# EAGLE board lcpxpresso-mainboard (EAGLE 5.11)
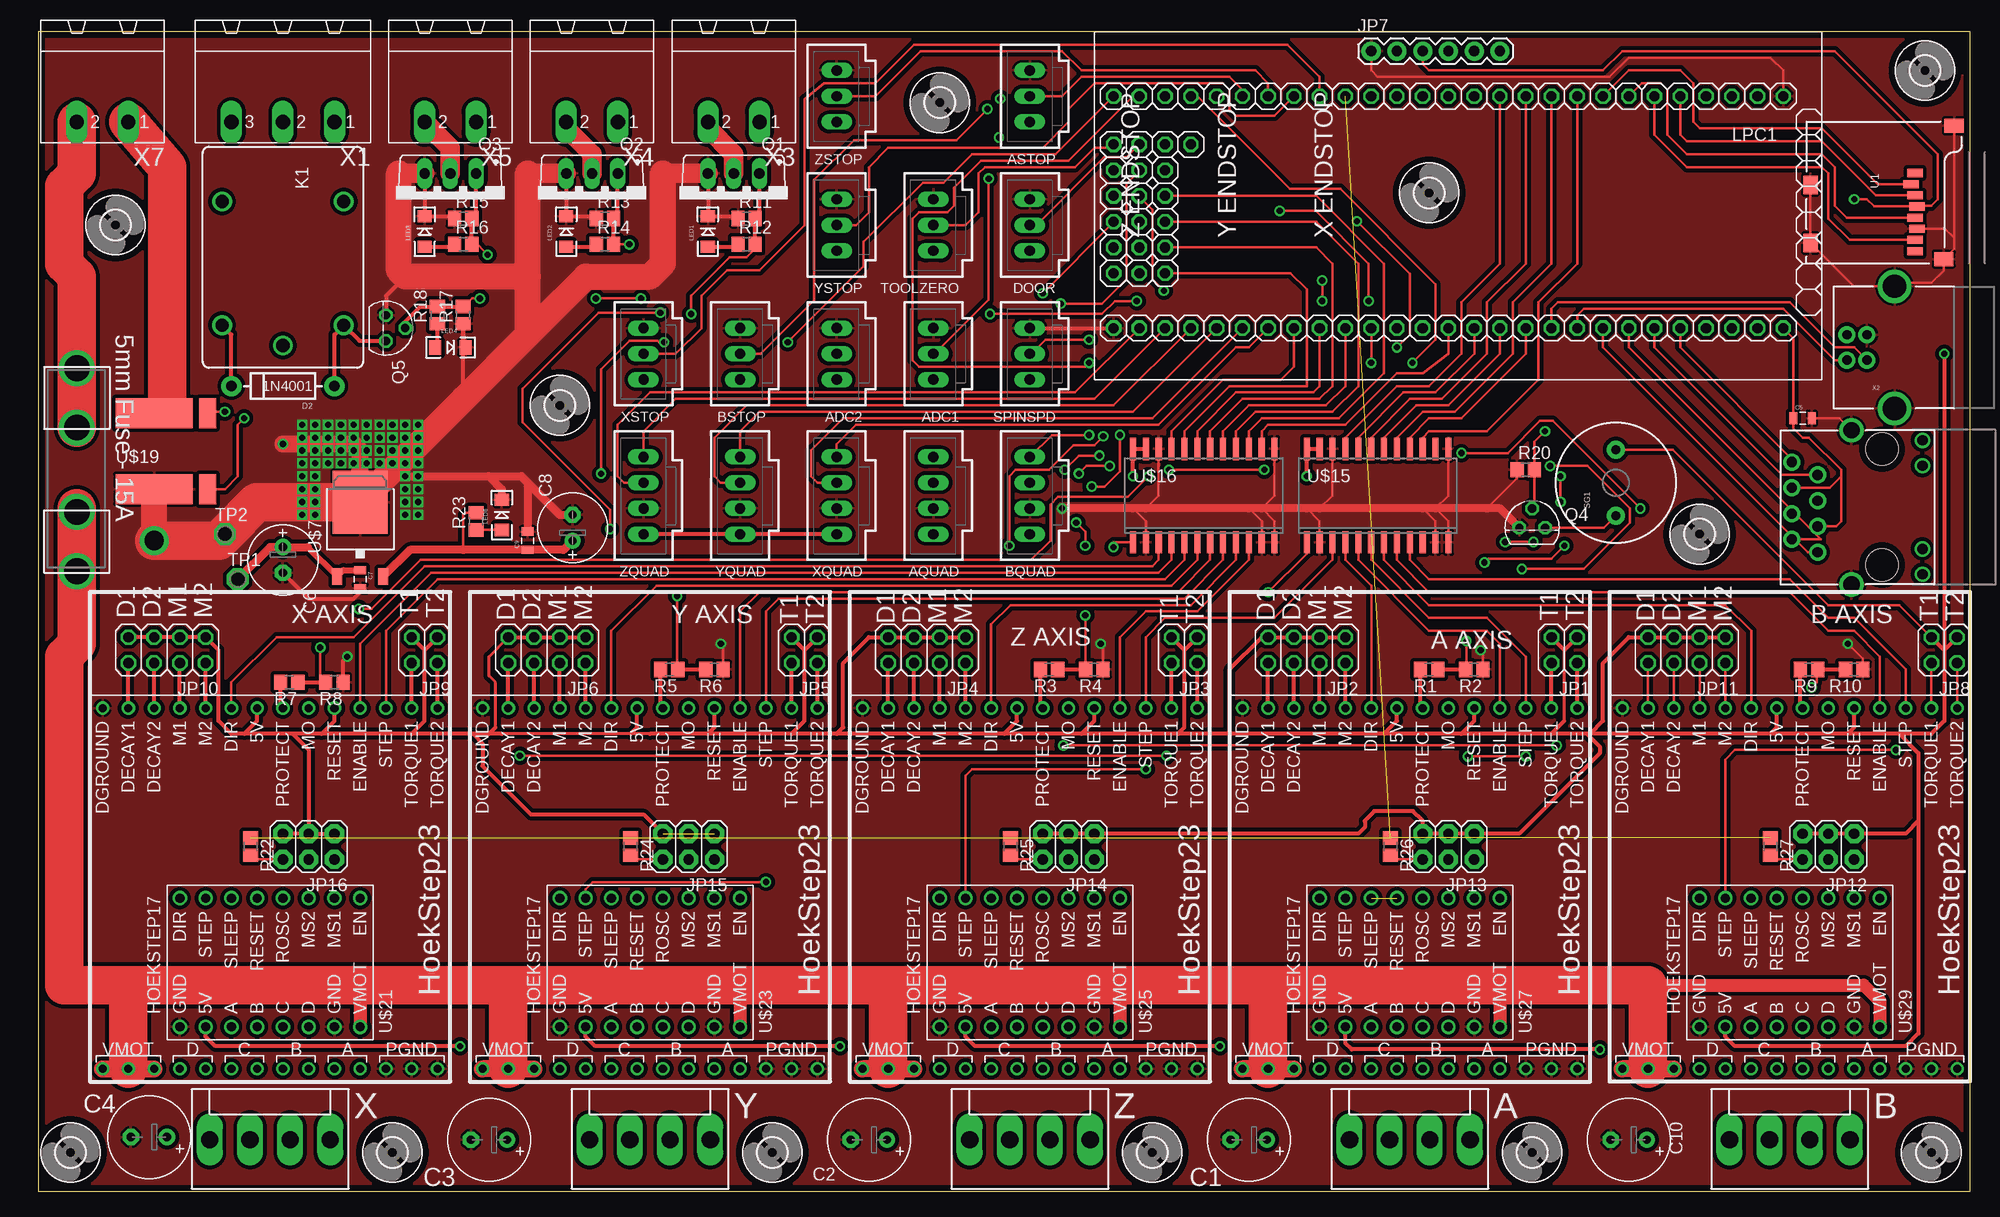
[diagram p0: board, top side]
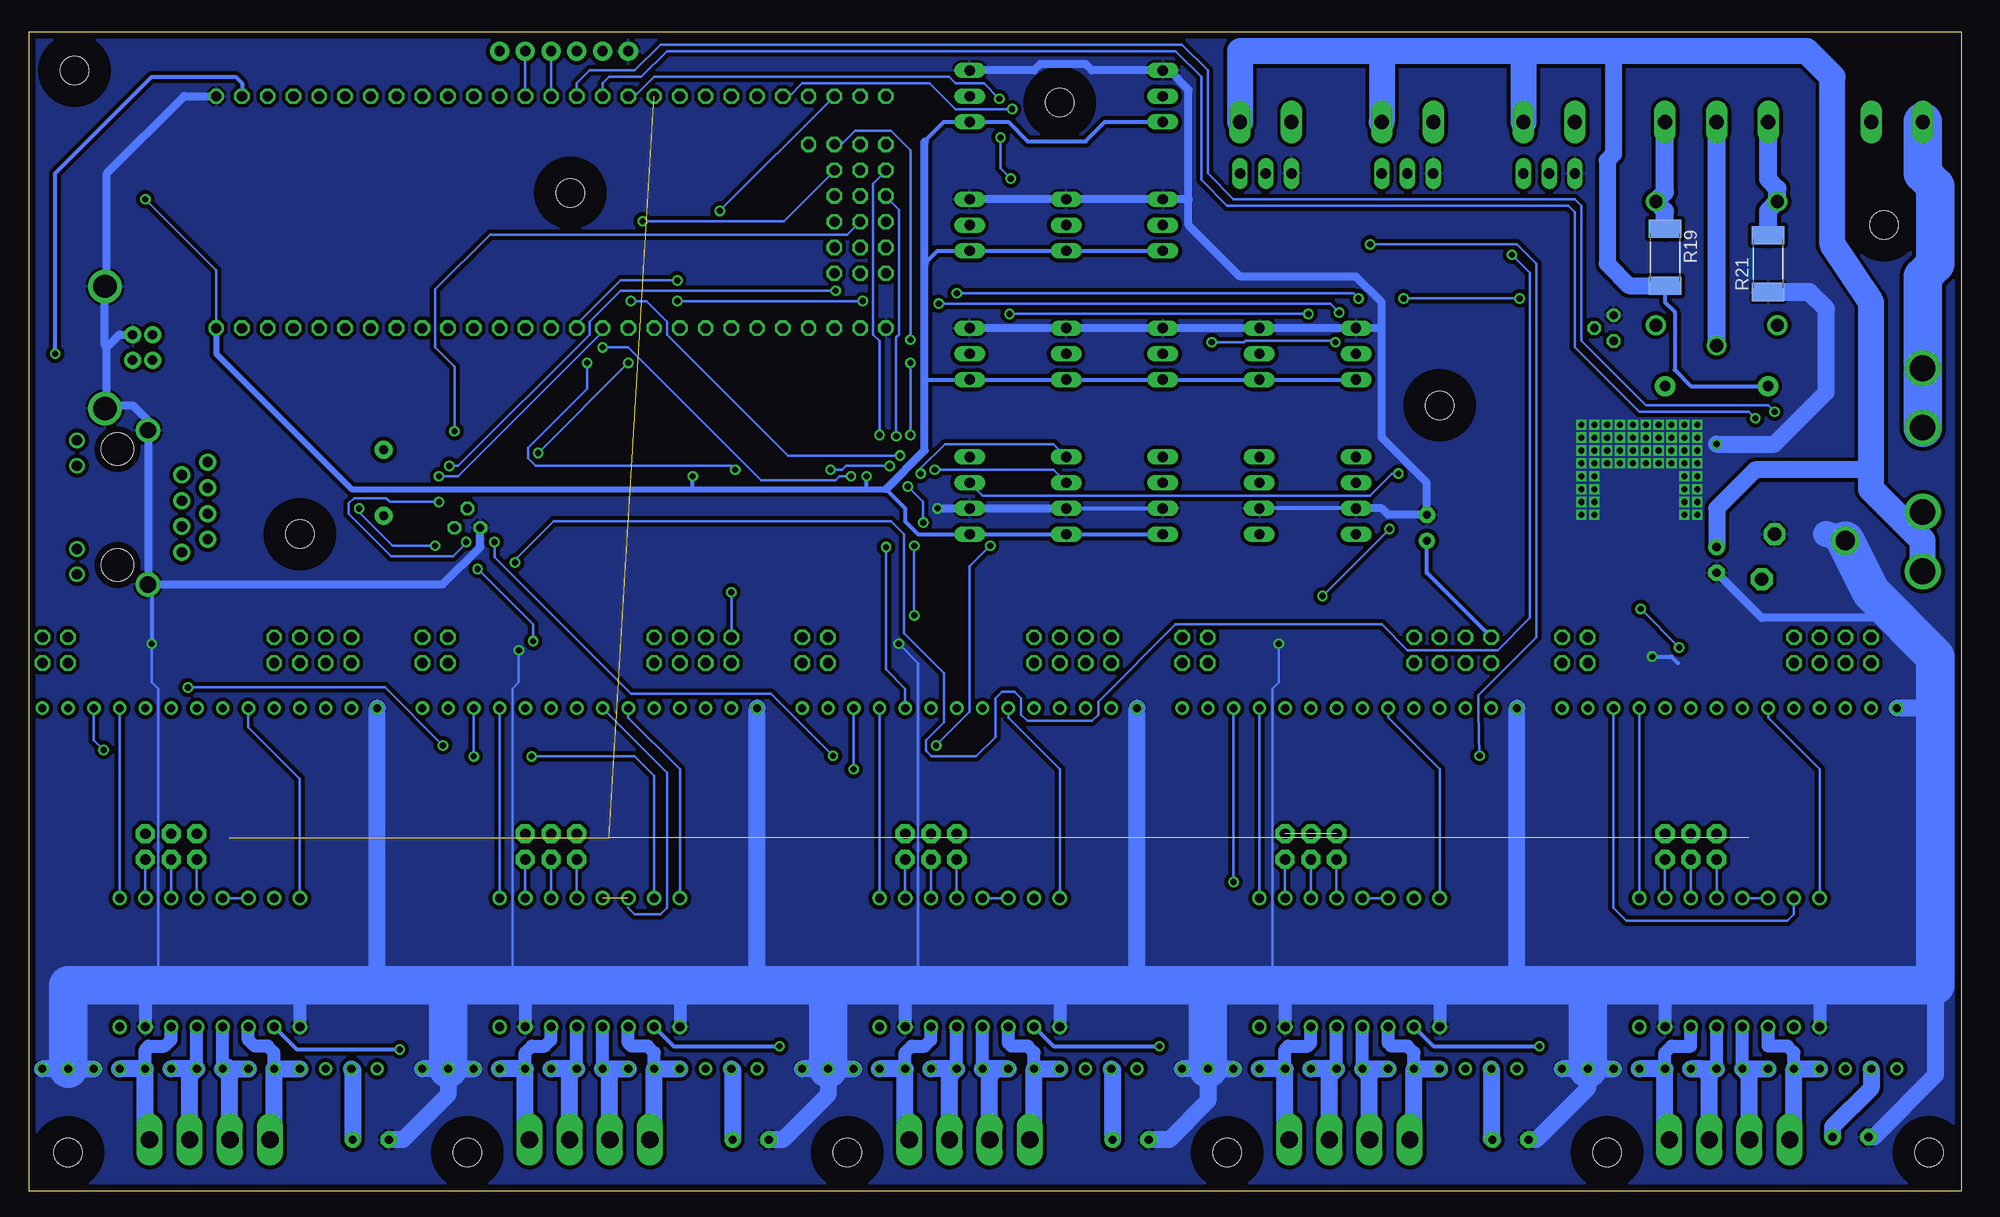
[diagram p1: board, bottom side, seen from below]

Size 190.5 x 114.3 mm. Coordinates in mm from the lower left corner, seen from the top.
Outline: 190.5,114.3 0,114.3 0,0 190.5,0 190.5,114.3
Copper layers (1*16): Top 0.035mm / dielectric 1.5mm / Bottom 0.035mm
Design rules "default *": minimum track width 10mil, minimum drill 24mil, track to track 15mil, track to pad 15mil, pad to pad 15mil, via to via 15mil, smd to smd 15mil, copper to edge 25mil, drill to drill 15mil, minimum pad ring 10mil, minimum via ring 8mil, stop-mask expansion 4mil, vias tented up to drill 0mil, thermal gap 10mil
Net classes: 0 default: width 0.406 mm, clearance 0.381 mm; 1 power: width 1.524 mm, clearance 0.635 mm; 2 highvolt: width 1.778 mm, clearance 3.175 mm; 3 signals: width 0.254 mm, clearance 0.318 mm

## Footprints (pad centres in the part's own frame; a part is rotated, then mirrored left to right if it is on the bottom)
KK-156-4 = drill 1.7 pad 2.184 long: 1 -5.94,0; 2 -1.98,0; 3 1.98,0; 4 5.94,0
70543-03 = drill 1.016 long: 1 -2.54,0; 2 0,0; 3 2.54,0
70543-04 = drill 1.016 long: 1 -3.81,0; 2 -1.27,0; 3 1.27,0; 4 3.81,0
E3,5-8 = drill 0.813 pad 1.6 round: + -1.778,0 | drill 0.813 pad 1.6 octagon: - 1.778,0
0805 = smd 0.8 x 1.2: 1 -0.9,0; 2 0.9,0
E2,5-7 = drill 0.813 pad 1.6 round: + -1.27,0 | drill 0.813 pad 1.6 octagon: - 1.27,0
DIODE-1N4001 = drill 1 pad 1.981 round: A -5.08,0; C 5.08,0
FUSE_5MM = drill 2.54 pad 3.556 round: 1 0,-10; 2 0,-4.158; 3 0,4.158; 4 0,10
2,8 = hole 2.8: 0,0
2X02 = drill 1.016 octagon: 1 -1.27,-1.27; 2 -1.27,1.27; 3 1.27,-1.27; 4 1.27,1.27
2X04 = drill 1.016 octagon: 1 -3.81,-1.27; 2 -3.81,1.27; 3 -1.27,-1.27; 4 -1.27,1.27; 5 1.27,-1.27; 6 1.27,1.27; 7 3.81,-1.27; 8 3.81,1.27
1X06 = drill 1.016 pad 1.88 round: 1 0,0; 2 2.54,0; 3 5.08,0; 4 7.62,0; 5 10.16,0; 6 12.7,0
2X03 = drill 1.016 pad 1.88 octagon: 1 -2.54,-1.27; 2 -2.54,1.27; 3 0,-1.27; 4 0,1.27; 5 2.54,-1.27; 6 2.54,1.27
JS-M = drill 1.3 round: 1 6.7,6; 2 6.7,-6; C 8.7,0; NC -5.5,-6; NO -5.5,6
LED-1206 = smd 1.2 x 1.4: A -1.5,0; C 1.5,0
LPCXPRESSO_LPC1769 = drill 1 octagon: 1 3.81,6.35; 2 6.35,6.35; 3 8.89,6.35; 4 11.43,6.35; 5 13.97,6.35; 6 16.51,6.35; 7 19.05,6.35; 8 21.59,6.35; 9 24.13,6.35; 10 26.67,6.35; 11 29.21,6.35; 12 31.75,6.35; 13 34.29,6.35; 14 36.83,6.35; 15 39.37,6.35; 16 41.91,6.35; 17 44.45,6.35; 18 46.99,6.35; 19 49.53,6.35; 20 52.07,6.35; 21 54.61,6.35; 22 57.15,6.35; 23 59.69,6.35; 24 62.23,6.35; 25 64.77,6.35; 26 67.31,6.35; 27 69.85,6.35; 28 3.81,29.21; 29 6.35,29.21; 30 8.89,29.21; 31 11.43,29.21; 32 13.97,29.21; 33 16.51,29.21; 34 19.05,29.21; 35 21.59,29.21; 36 24.13,29.21; 37 26.67,29.21; 38 29.21,29.21; 39 31.75,29.21; 40 34.29,29.21; 41 36.83,29.21; 42 39.37,29.21; 43 41.91,29.21; 44 44.45,29.21; 45 46.99,29.21; 46 49.53,29.21; 47 52.07,29.21; 48 54.61,29.21; 49 57.15,29.21; 50 59.69,29.21; 51 62.23,29.21; 52 64.77,29.21; 53 67.31,29.21; 54 69.85,29.21; 55 62.23,11.1; 56 64.77,11.1; 57 67.31,11.1; 58 69.85,11.1; 59 64.77,13.64; 60 67.31,13.64; 61 69.85,13.64; 62 64.77,16.18; 63 67.31,16.18; 64 69.85,16.18; 65 64.77,18.72; 66 67.31,18.72; 67 69.85,18.72; 68 64.77,21.26; 69 67.31,21.26; 70 69.85,21.26; 71 64.77,23.8; 72 67.31,23.8; 73 69.85,23.8
TO220BV = drill 1.016 long: D 0,-2.54; G -2.54,-2.54; S 2.54,-2.54
TO92 = drill 0.813 octagon: 1 1.27,0; 2 0,1.905; 3 -1.27,0
R0805 = smd 1.3 x 1.5: 1 -0.85,0; 2 0.85,0
R2512 = smd 1.8 x 3.2: 1 -2.8,0; 2 2.8,0
BUZZER-12MM = drill 0.9 pad 1.778 round: + 3.25,0; - -3.25,0
P1-13 = drill 1.321 pad 2.159 octagon: TP 0,0
MICRO-SD-SOCKET-PP = smd 0.8 x 1.5: 1 -8.94,10.7; 2 -7.84,10.3; 3 -6.74,10.7; 4 -5.64,10.9; 5 -4.54,10.7; 6 -3.44,10.9; 7 -2.34,10.7; 8 -1.24,10.7 | smd 1.8 x 1.4: CD1 -2.05,0.4; CD2 -7.75,0.4 | smd 1.4 x 1.9: GND1 -13.6,14.55; GND3 -0.45,13.55
HOEKSTEP23 = drill 0.8 round: A1 17.78,7.62; A2 17.78,5.08; B1 17.78,2.54; B2 17.78,0; C1 17.78,-2.54; C2 17.78,-5.08; CLOCK -17.78,10.16; D1 17.78,-7.62; D2 17.78,-10.16; DCY1 -17.78,-15.24; DCY2 -17.78,-12.7; DGND -17.78,-17.78; DIR -17.78,-5.08; EN -17.78,7.62; M1 -17.78,-10.16; M2 -17.78,-7.62; MO -17.78,2.54; PGND1 17.78,15.24; PGND2 17.78,12.7; PGND3 17.78,10.16; PROTECT -17.78,0; RESET -17.78,5.08; TQ1 -17.78,12.7; TQ2 -17.78,15.24; VCC -17.78,-2.54; VMOT1 17.78,-12.7; VMOT2 17.78,-15.24; VMOT3 17.78,-17.78
MAGJACK = drill 1 pad 1.676 round: 1 3.175,17.445; 2 4.445,19.985; 3 5.715,17.445; 4 6.985,19.985; 5 8.255,17.445; 6 9.525,19.985; 7 10.795,17.445; 8 12.065,19.985 | drill 1 pad 1.27 round: 9 1,7.1; 10 3.5,7.1; 11 11.7,7.1; 12 14.2,7.1 | drill 1.6 pad 2.184 round: GNDL 0,14.1; GNDR 15.2,14.1 | hole 3.2: 1.905,11.095; 13.335,11.095
TO252 = smd 1 x 1.6: 1 -2.28,-4.8; 2 2.28,-4.8 | smd 5.4 x 6.2: 3 0,2.5
SO24W = smd 0.6 x 2.2: 1 -6.985,-4.6; 2 -5.715,-4.6; 3 -4.445,-4.6; 4 -3.175,-4.6; 5 -1.905,-4.6; 6 -0.635,-4.6; 7 0.635,-4.6; 8 1.905,-4.6; 9 3.175,-4.6; 10 4.445,-4.6; 11 5.715,-4.6; 12 6.985,-4.6; 13 6.985,4.6; 14 5.715,4.6; 15 4.445,4.6; 16 3.175,4.6; 17 1.905,4.6; 18 0.635,4.6; 19 -0.635,4.6; 20 -1.905,4.6; 21 -3.175,4.6; 22 -4.445,4.6; 23 -5.715,4.6; 24 -6.985,4.6
WSL3637 = smd 7.62 x 2.946: 1 3.81,8.738; 4 3.81,1.27 | smd 1.676 x 2.946: 2 9.068,8.738; 3 9.068,1.27
HOEKSTEP17 = drill 0.9 round: A -6.35,-5.08; B -6.35,-7.62; C -6.35,-10.16; D -6.35,-12.7; DIR 6.35,0; ENABLE 6.35,-17.78; GND1 -6.35,0; GND2 -6.35,-15.24; MS1 6.35,-15.24; MS2 6.35,-12.7; RESET 6.35,-7.62; ROSC 6.35,-10.16; SLEEP 6.35,-5.08; STEP 6.35,-2.54; VCC -6.35,-2.54; VMOT -6.35,-17.78
MSTBA3 = drill 1.397 long: 1 -5.08,5.08; 2 0,5.08; 3 5.08,5.08
USB-B-PTH = drill 0.914 pad 1.676 round: D+ 0,1.25; D- 1.981,1.25; GND 0,-1.25; VBUS 1.981,-1.25 | drill 2.286 round: P$1 -2.718,-6.02; P$2 -2.718,6.02
MSTBA2 = drill 1.397 long: 1 -2.54,5.08; 2 2.54,5.08

## Placement (x,y rotation side)
A  [KK-156-4]  135.25,5.08 0 top
ADC1  C-GRID-03-70543  [70543-03]  88.27,82.55 90 top
ADC2  C-GRID-03-70543  [70543-03]  78.74,82.55 90 top
AQUAD  C-GRID-04-70543  [70543-04]  88.27,68.58 90 top
ASTOP  C-GRID-03-70543  [70543-03]  97.79,107.95 90 top
B  [KK-156-4]  172.72,5.08 0 top
BQUAD  C-GRID-04-70543  [70543-04]  97.79,68.58 90 top
BSTOP  C-GRID-03-70543  [70543-03]  69.22,82.55 90 top
C1  470uF  [E3,5-8]  119.38,5.08 180 top
C2  470uF  [E3,5-8]  81.92,5.08 180 top
C3  470uF  [E3,5-8]  44.45,5.08 180 top
C4  470uF  [E3,5-8]  10.92,5.33 180 top
C5  100nF  [0805]  173.99,76.2 0 top
C6  100uF  [E2,5-7]  24.13,62.23 270 top
C7  100nF  [0805]  31.75,60.33 270 top
C8  100uF  [E2,5-7]  52.7,65.41 90 top
C9  100nF  [0805]  48.26,64.14 90 top
C10  470uF  [E3,5-8]  156.84,5.08 180 top
D2  1N4001  [DIODE-1N4001]  24.13,79.38 180 top
DOOR  C-GRID-03-70543  [70543-03]  97.79,95.25 90 top
F1  FUSEX20MM  [FUSE_5MM]  3.81,71.12 0 top
H1  MOUNT-HOLE2.8  [2,8]  3.17,3.81 0 top
H2  MOUNT-HOLE2.8  [2,8]  34.92,3.81 0 top
H3  MOUNT-HOLE2.8  [2,8]  72.39,3.81 0 top
H4  MOUNT-HOLE2.8  [2,8]  109.86,3.81 0 top
H5  MOUNT-HOLE2.8  [2,8]  147.32,3.81 0 top
H6  MOUNT-HOLE2.8  [2,8]  186.69,3.81 0 top
H7  MOUNT-HOLE2.8  [2,8]  186.06,110.49 0 top
H8  MOUNT-HOLE2.8  [2,8]  163.83,64.77 0 top
H9  MOUNT-HOLE2.8  [2,8]  88.9,107.31 0 top
H10  MOUNT-HOLE2.8  [2,8]  7.62,95.25 0 top
H11  MOUNT-HOLE2.8  [2,8]  51.44,77.47 0 top
H12  MOUNT-HOLE2.8  [2,8]  137.16,98.42 0 top
JP1  [2X02]  150.5,53.34 180 top
JP2  [2X04]  125.09,53.34 180 top
JP3  [2X02]  113.03,53.34 180 top
JP4  [2X04]  87.63,53.34 180 top
JP5  [2X02]  75.56,53.34 180 top
JP6  [2X04]  50.16,53.34 180 top
JP7  [1X06]  131.44,112.39 0 top
JP8  [2X02]  187.96,53.34 180 top
JP9  [2X02]  38.1,53.34 180 top
JP10  [2X04]  12.7,53.34 180 top
JP11  [2X04]  162.56,53.34 180 top
JP12  [2X03]  176.53,33.97 180 top
JP13  [2X03]  139.06,33.97 180 top
JP14  [2X03]  101.6,33.97 180 top
JP15  [2X03]  64.14,33.97 180 top
JP16  [2X03]  26.67,33.97 180 top
K1  JS-M1-12V-5  [JS-M]  24.13,92.08 270 top
LED1  [LED-1206]  66.04,94.61 90 top
LED2  [LED-1206]  52.07,94.61 90 top
LED3  [LED-1206]  38.1,94.61 90 top
LED4  [LED-1206]  40.64,83.19 0 top
LED6  [LED-1206]  45.72,66.67 90 top
LPC1  [LPCXPRESSO_LPC1769]  175.9,114.3 180 top
Q1  IRF512  [TO220BV]  68.58,97.79 180 top
Q2  IRF512  [TO220BV]  54.61,97.79 180 top
Q3  IRF512  [TO220BV]  40.64,97.79 180 top
Q4  2N3819  [TO92]  147.32,65.41 0 top
Q5  2N3819  [TO92]  34.29,85.09 270 top
R1  22K  [R0805]  137.16,51.44 180 top
R2  39K  [R0805]  141.6,51.44 180 top
R3  22K  [R0805]  99.69,51.44 180 top
R4  39K  [R0805]  104.14,51.44 180 top
R5  22K  [R0805]  62.23,51.44 180 top
R6  39K  [R0805]  66.67,51.44 180 top
R7  22K  [R0805]  24.77,50.16 180 top
R8  39K  [R0805]  29.21,50.16 180 top
R9  22K  [R0805]  174.62,51.44 180 top
R10  39K  [R0805]  179.07,51.44 180 top
R11  10k  [R0805]  69.85,95.89 0 top
R12  100  [R0805]  69.85,93.34 0 top
R13  10k  [R0805]  55.88,95.89 0 top
R14  100  [R0805]  55.88,93.34 0 top
R15  10k  [R0805]  41.91,95.89 0 top
R16  100  [R0805]  41.91,93.34 0 top
R17  10k  [R0805]  41.91,86.36 90 top
R18  100  [R0805]  39.37,86.36 90 top
R19  DNP  [R2512]  29.21,92.08 270 bottom
R20  10k  [R0805]  146.69,71.12 0 top
R21  DNP  [R2512]  19.05,91.44 90 bottom
R22  0  [R0805]  20.95,33.97 270 top
R23  560  [R0805]  43.18,66.04 90 top
R24  0  [R0805]  58.42,33.97 270 top
R25  0  [R0805]  95.89,33.97 270 top
R26  0  [R0805]  133.35,33.97 270 top
R27  0  [R0805]  170.81,33.97 270 top
SG1  BUZZERPTH  [BUZZER-12MM]  155.57,69.85 90 top
SPINSPD  C-GRID-03-70543  [70543-03]  97.79,82.55 90 top
TOOLZERO  C-GRID-03-70543  [70543-03]  88.27,95.25 90 top
TP1  PTR1PAD1-13  [P1-13]  19.68,60.33 0 top
TP2  PTR1PAD1-13  [P1-13]  18.41,64.77 0 top
U1  USD-SOCKETNEW  [MICRO-SD-SOCKET-PP]  174.37,91.44 270 top
U$1  HOEKSTEP23  [HOEKSTEP23]  24.13,29.84 270 top
U$2  HOEKSTEP23  [HOEKSTEP23]  61.59,29.84 270 top
U$3  HOEKSTEP23  [HOEKSTEP23]  99.06,29.84 270 top
U$4  HOEKSTEP23  [HOEKSTEP23]  136.53,29.84 270 top
U$6  MAGJACK  [MAGJACK]  192.91,59.82 90 top
U$7  IXF25001  [TO252]  31.75,65.41 0 top
U$9  HOEKSTEP23  [HOEKSTEP23]  173.99,29.84 270 top
U$15  SN74LVC4245ADW  [SO24W]  132.08,68.58 0 top
U$16  SN74LVC4245ADW  [SO24W]  114.94,68.58 0 top
U$19  WSL3637  [WSL3637]  7.62,67.94 0 top
U$21  HOEKSTEP17  [HOEKSTEP17]  13.97,22.54 90 top
U$23  HOEKSTEP17  [HOEKSTEP17]  51.44,22.54 90 top
U$25  HOEKSTEP17  [HOEKSTEP17]  88.9,22.54 90 top
U$27  HOEKSTEP17  [HOEKSTEP17]  126.36,22.54 90 top
U$29  HOEKSTEP17  [HOEKSTEP17]  163.83,22.54 90 top
X  [KK-156-4]  22.86,5.08 0 top
X1  MSTBA3  [MSTBA3]  24.13,110.49 180 top
X2  USBPTH  [USB-B-PTH]  180.34,83.19 180 top
X3  MSTBA2  [MSTBA2]  68.58,110.49 180 top
X4  MSTBA2  [MSTBA2]  54.61,110.49 180 top
X5  MSTBA2  [MSTBA2]  40.64,110.49 180 top
X7  MSTBA2  [MSTBA2]  6.35,110.49 180 top
XQUAD  C-GRID-04-70543  [70543-04]  78.74,68.58 90 top
XSTOP  C-GRID-03-70543  [70543-03]  59.69,82.55 90 top
Y  [KK-156-4]  60.33,5.08 0 top
YQUAD  C-GRID-04-70543  [70543-04]  69.22,68.58 90 top
YSTOP  C-GRID-03-70543  [70543-03]  78.74,95.25 90 top
Z  [KK-156-4]  97.79,5.08 0 top
ZQUAD  C-GRID-04-70543  [70543-04]  59.69,68.58 90 top
ZSTOP  C-GRID-03-70543  [70543-03]  78.74,107.95 90 top

## Library data of the parts
A ADC1 ADC2 AQUAD ASTOP B BQUAD BSTOP DOOR SPINSPD TOOLZERO X XQUAD XSTOP Y YQUAD YSTOP Z ZQUAD ZSTOP = con-molex; OC_FARNELL: unknown; OC_NEWARK: unknown
C1-C4 C6 C8 C10 = rcl
C5 C7 C9 D2 F1 JP7 JP12-JP16 LED1-LED4 LED6 SG1 U1 = SparkFun
H1-H12 = holes
JP1-JP6 JP8-JP11 = pinhead
K1 = relay
LPC1 = LPCXpresso_boards
Q1-Q3 = transistor-power
Q4 Q5 = transistor-fet
R1-R27 = resistor
TP1 TP2 = testpad
U$1-U$4 U$6 U$7 U$9 U$19 U$21 U$23 U$25 U$27 U$29 X2 = Hoektronics
U$15 U$16 = MakerBot
X1 = con-phoenix-508; MF: FARNELL; MPN: 1757255; OC_FARNELL: 3705183; OC_NEWARK: 71C4162
X3-X5 X7 = con-phoenix-508; MF: FARNELL; MPN: 1757242; OC_FARNELL: 3705171; OC_NEWARK: 71C4161

## Nets
3.3V: ADC1.1 ADC2.1 AQUAD.1 ASTOP.1 BQUAD.1 BSTOP.1 C5.1 DOOR.1 JP7.3 LPC1.28 SPINSPD.1 TOOLZERO.1 U1.4 U$6.3 U$6.6 U$15.23 U$15.24 U$16.23 U$16.24 XQUAD.1 XSTOP.1 YQUAD.1 YSTOP.1 ZQUAD.1 ZSTOP.1
5V: C8.+ C9.1 JP1.1 JP1.3 JP2.1 JP2.3 JP2.5 JP2.7 JP3.1 JP3.3 JP4.1 JP4.3 JP4.5 JP4.7 JP5.1 JP5.3 JP6.1 JP6.3 JP6.5 JP6.7 JP8.1 JP8.3 JP9.1 JP9.3 JP10.1 JP10.3 JP10.5 JP10.7 JP11.1 JP11.3 JP11.5 JP11.7 JP12.1 JP12.3 JP12.5 JP13.1 JP13.3 JP13.5 JP14.1 JP14.3 JP14.5 JP15.1 JP15.3 JP15.5 JP16.1 JP16.3 JP16.5 LPC1.2 R23.2 SG1.+ U$1.RESET U$1.VCC U$2.RESET U$2.VCC U$3.RESET U$3.VCC U$4.RESET U$4.VCC U$7.2 U$9.RESET U$9.VCC U$15.1 U$16.1 U$21.VCC U$23.VCC U$25.VCC U$27.VCC U$29.VCC
+24V [power]: C1.+ C2.+ C3.+ C4.+ C6.+ C7.1 C10.+ D2.C F1.1 K1.2 R19.2 TP1.TP U$1.VMOT1 U$1.VMOT2 U$1.VMOT3 U$2.VMOT1 U$2.VMOT2 U$2.VMOT3 U$3.VMOT1 U$3.VMOT2 U$3.VMOT3 U$4.VMOT1 U$4.VMOT2 U$4.VMOT3 U$7.1 U$9.VMOT1 U$9.VMOT2 U$9.VMOT3 U$21.VMOT U$23.VMOT U$25.VMOT U$27.VMOT U$29.VMOT X3.1 X4.1 X5.1
AA [power]: A.4 U$4.A1 U$4.A2 U$27.D
AB [power]: A.3 U$4.B1 U$4.B2 U$27.C
AC [power]: A.2 U$4.C1 U$4.C2 U$27.B
AD [power]: A.1 U$4.D1 U$4.D2 U$27.A
ADC1 [signals]: JP2.8 U$4.DCY1
ADC2 [signals]: JP2.6 U$4.DCY2
ADIR [signals]: U$4.DIR U$15.4 U$27.DIR
AENABLE [signals]: U$4.EN U$15.5 U$27.ENABLE
AM1 [signals]: JP2.4 U$4.M1
AM2 [signals]: JP2.2 U$4.M2
ASTEP [signals]: U$4.CLOCK U$15.6 U$27.STEP
ATQ1 [signals]: JP1.4 U$4.TQ1
ATQ2 [signals]: JP1.2 U$4.TQ2
BA [power]: B.4 U$9.A1 U$9.A2 U$29.D
BB [power]: B.3 U$9.B1 U$9.B2 U$29.C
BC [power]: B.2 U$9.C1 U$9.C2 U$29.B
BD [power]: B.1 U$9.D1 U$9.D2 U$29.A
BDC1 [signals]: JP11.8 U$9.DCY1
BDC2 [signals]: JP11.6 U$9.DCY2
BDIR [signals]: U$9.DIR U$15.7 U$29.DIR
BENABLE [signals]: U$9.EN U$15.8 U$29.ENABLE
BM1 [signals]: JP11.4 U$9.M1
BM2 [signals]: JP11.2 U$9.M2
BSTEP [signals]: U$9.CLOCK U$15.9 U$29.STEP
BTQ1 [signals]: JP8.4 U$9.TQ1
BTQ2 [signals]: JP8.2 U$9.TQ2
D+ [signals]: LPC1.37 X2.D+
D- [signals]: LPC1.36 X2.D-
ETHRD+ [signals]: LPC1.33 U$6.7
ETHRD- [signals]: LPC1.32 U$6.8
ETHTD+ [signals]: LPC1.35 U$6.1
ETHTD- [signals]: LPC1.34 U$6.2
GND: ADC1.3 ADC2.3 AQUAD.2 ASTOP.3 BQUAD.2 BSTOP.3 C1.- C2.- C3.- C4.- C5.2 C6.- C7.2 C8.- C9.2 C10.- DOOR.3 JP7.1 LED1.C LED2.C LED3.C LED4.C LED6.C LPC1.1 LPC1.54 Q1.S Q2.S Q3.S Q4.3 Q5.3 R2.1 R4.1 R6.1 R8.1 R10.1 R11.1 R13.1 R15.1 R17.1 R20.1 R21.1 SPINSPD.3 TOOLZERO.3 TP2.TP U1.6 U1.CD1 U1.CD2 U1.GND1 U1.GND3 U$1.DGND U$1.PGND1 U$1.PGND2 U$1.PGND3 U$2.DGND U$2.PGND1 U$2.PGND2 U$2.PGND3 U$3.DGND U$3.PGND1 U$3.PGND2 U$3.PGND3 U$4.DGND U$4.PGND1 U$4.PGND2 U$4.PGND3 U$6.GNDL U$6.GNDR U$7.3 U$9.DGND U$9.PGND1 U$9.PGND2 U$9.PGND3 U$15.2 U$15.11 U$15.12 U$15.13 U$15.22 U$16.2 U$16.11 U$16.12 U$16.13 U$16.22 U$19.4 U$21.GND1 U$21.GND2 U$23.GND1 U$23.GND2 U$25.GND1 U$25.GND2 U$27.GND1 U$27.GND2 U$29.GND1 U$29.GND2 X2.GND X2.P$1 X2.P$2 XQUAD.2 XSTOP.3 YQUAD.2 YSTOP.3 ZQUAD.2 ZSTOP.3
N$1: U$21.RESET U$21.SLEEP
N$2: U$23.RESET U$23.SLEEP
N$3: U$25.RESET U$25.SLEEP
N$4: U$27.RESET U$27.SLEEP
N$5: U$29.RESET U$29.SLEEP
N$6: F1.3 X7.2
N$7: JP16.2 U$21.MS1
N$8: R3.2 U$3.PROTECT
N$9: JP16.4 U$21.MS2
N$10: JP16.6 R22.2 U$21.ROSC
N$11: JP15.2 U$23.MS1
N$12: JP15.4 U$23.MS2
N$13: JP15.6 R24.2 U$23.ROSC
N$14: JP14.2 U$25.MS1
N$15 [highvolt]: K1.NO R19.1 X1.1
N$16: R1.2 U$4.PROTECT
N$17 [power]: Q1.D X3.2
N$18 [signals]: LED1.A R12.1
N$19 [power]: Q2.D X4.2
N$20 [signals]: LED2.A R14.1
N$21: JP14.4 U$25.MS2
N$22: JP14.6 R25.2 U$25.ROSC
N$23: JP13.2 U$27.MS1
N$24: JP13.4 U$27.MS2
N$25 [power]: Q3.D X5.2
N$26 [signals]: LED3.A R16.1
N$27: U$19.1 X7.1
N$28 [signals]: U$15.10
N$29 [highvolt]: K1.C X1.2
N$30: D2.A K1.1 Q5.1
N$31: JP13.6 R26.2 U$27.ROSC
N$32: JP12.2 U$29.MS1
N$33: JP12.4 U$29.MS2
N$34: JP12.6 R27.2 U$29.ROSC
N$35 [signals]: LED4.A R18.1
N$37 [highvolt]: K1.NC R21.2 X1.3
N$38 [signals]: Q4.1 SG1.-
N$39: LED6.A R23.1
N$40 [signals]: U$15.14
N$42: R9.2 U$9.PROTECT
N$43: R7.2 U$1.PROTECT
N$44: R5.2 U$2.PROTECT
P0.0 [signals]: LPC1.9 U$15.15
P0.1 [signals]: LPC1.10 U$15.17
P0.2 [signals]: LPC1.21 ZSTOP.2
P0.3 [signals]: ASTOP.2 LPC1.22
P0.4 [signals]: LPC1.38 U$15.16
P0.5 [signals]: LPC1.39 U$15.18
P0.6 [signals]: LPC1.8 U1.2
P0.7 [signals]: LPC1.7 U1.5
P0.8 [signals]: LPC1.6 U1.7
P0.9 [signals]: LPC1.5 U1.3
P0.10 [signals]: LPC1.40 U$15.20
P0.11 [signals]: LPC1.41 U$16.14
P0.15: JP7.5 LPC1.13
P0.16: JP7.4 LPC1.14
P0.17 [signals]: LPC1.12 U$15.21
P0.18 [signals]: LPC1.11 U$15.19
P0.19 [signals]: DOOR.2 LPC1.57
P0.20 [signals]: LPC1.56 SPINSPD.2
P0.21 [signals]: BSTOP.2 LPC1.23
P0.22 [signals]: AQUAD.4 LPC1.24
P0.23 [signals]: LPC1.15 U$19.2
P0.24 [signals]: LPC1.16 U$19.3
P0.25 [signals]: ADC1.2 LPC1.17
P0.26 [signals]: LPC1.18 R22.1 R24.1 R25.1 R26.1 R27.1
P0.27 [signals]: AQUAD.3 LPC1.25
P0.28 [signals]: BQUAD.4 LPC1.26
P1.18: LPC1.73
P1.19: LPC1.72
P1.20 [signals]: LPC1.71 U$16.20
P1.21: LPC1.70
P1.22: LPC1.69
P1.23 [signals]: LPC1.68 U$16.18
P1.24 [signals]: LPC1.67 Q5.2 R17.2 R18.2
P1.25 [signals]: LPC1.66 Q4.2 R20.2
P1.26 [signals]: LPC1.65 U$16.16
P1.27 [signals]: LPC1.64 R9.1 R10.2
P1.28 [signals]: LPC1.63 R1.1 R2.2
P1.29 [signals]: LPC1.62 U$16.15
P1.30 [signals]: LPC1.19 XSTOP.2
P1.31 [signals]: LPC1.20 YSTOP.2
P2.0 [signals]: LPC1.42 Q1.G R11.2 R12.2
P2.1 [signals]: LPC1.43 Q2.G R13.2 R14.2
P2.2 [signals]: LPC1.44 Q3.G R15.2 R16.2
P2.3 [signals]: LPC1.45 U$16.17
P2.4 [signals]: LPC1.46 U$16.19
P2.5 [signals]: LPC1.47 U$16.21
P2.6 [signals]: LPC1.48 XQUAD.4
P2.7 [signals]: LPC1.49 XQUAD.3
P2.8 [signals]: LPC1.50 YQUAD.4
P2.9: LPC1.55
P2.10 [signals]: LPC1.51 YQUAD.3
P2.11 [signals]: LPC1.52 ZQUAD.4
P2.12 [signals]: LPC1.53 ZQUAD.3
P2.13 [signals]: BQUAD.3 LPC1.27
P3.25 [signals]: LPC1.61 R3.1 R4.2
P3.26 [signals]: LPC1.60 R5.1 R6.2
P4.28 [signals]: LPC1.59 R7.1 R8.2
P4.29 [signals]: LPC1.58 TOOLZERO.2
RESET: LPC1.4
XA [power]: U$1.A1 U$1.A2 U$21.D X.4
XB [power]: U$1.B1 U$1.B2 U$21.C X.3
XC [power]: U$1.C1 U$1.C2 U$21.B X.2
XD [power]: U$1.D1 U$1.D2 U$21.A X.1
XDC1 [signals]: JP10.8 U$1.DCY1
XDC2 [signals]: JP10.6 U$1.DCY2
XDIR [signals]: U$1.DIR U$16.3 U$21.DIR
XENABLE [signals]: U$1.EN U$16.4 U$21.ENABLE
XM1 [signals]: JP10.4 U$1.M1
XM2 [signals]: JP10.2 U$1.M2
XSTEP [signals]: U$1.CLOCK U$16.5 U$21.STEP
XTQ1 [signals]: JP9.4 U$1.TQ1
XTQ2 [signals]: JP9.2 U$1.TQ2
YA [power]: U$2.A1 U$2.A2 U$23.D Y.4
YB [power]: U$2.B1 U$2.B2 U$23.C Y.3
YC [power]: U$2.C1 U$2.C2 U$23.B Y.2
YD [power]: U$2.D1 U$2.D2 U$23.A Y.1
YDC1 [signals]: JP6.8 U$2.DCY1
YDC2 [signals]: JP6.6 U$2.DCY2
YDIR [signals]: U$2.DIR U$16.6 U$23.DIR
YENABLE [signals]: U$2.EN U$16.7 U$23.ENABLE
YM1 [signals]: JP6.4 U$2.M1
YM2 [signals]: JP6.2 U$2.M2
YSTEP [signals]: U$2.CLOCK U$16.8 U$23.STEP
YTQ1 [signals]: JP5.4 U$2.TQ1
YTQ2 [signals]: JP5.2 U$2.TQ2
ZA [power]: U$3.A1 U$3.A2 U$25.D Z.4
ZB [power]: U$3.B1 U$3.B2 U$25.C Z.3
ZC [power]: U$3.C1 U$3.C2 U$25.B Z.2
ZD [power]: U$3.D1 U$3.D2 U$25.A Z.1
ZDC1 [signals]: JP4.8 U$3.DCY1
ZDC2 [signals]: JP4.6 U$3.DCY2
ZDIR [signals]: U$3.DIR U$16.9 U$25.DIR
ZENABLE [signals]: U$3.EN U$16.10 U$25.ENABLE
ZM1 [signals]: JP4.4 U$3.M1
ZM2 [signals]: JP4.2 U$3.M2
ZSTEP [signals]: U$3.CLOCK U$15.3 U$25.STEP
ZTQ1 [signals]: JP3.4 U$3.TQ1
ZTQ2 [signals]: JP3.2 U$3.TQ2

## Tracks (layer width: path | path; a pad name or v marks a point on that pad's centre or on a via)
3.3V  (via drill 0.6)
  Top 0.254: U$6.6 176.66,69.34 177.8,70.48 | U$6.3 177.29,65.53 177.8,66.04 177.8,70.48 | JP7.3 136.53,111.12 137.16,110.49 154.31,110.49 156.21,112.39 177.16,112.39 187.32,102.23 187.32,97.79 186.69,97.16 185.35,97.16 U1.4 181.05,97.08 180.34,97.79 v179.07,97.79 | 177.8,70.48 177.8,71.12 174.62,74.3 173.99,74.3 173.09,75.19 C5.1 173.09,84.08 LPC1.28
  Top 0.406: U$16.23 U$16.24 v107.95,70.48 | U$15.23 U$15.24 v125.09,70.48 | ZQUAD.1 YQUAD.1 XQUAD.1
  Bottom 0.254: LPC1.28 172.09,90.81 v179.07,97.79
  Bottom 0.406: 102.23,103.5 100.33,105.41 ASTOP.1 93.98,105.41 92.08,103.5 86.36,103.5 84.45,105.41 ZSTOP.1 | YSTOP.1 TOOLZERO.1 DOOR.1 100.97,92.71 102.23,91.44 | 102.23,80.01 SPINSPD.1 ADC1.1 ADC2.1 BSTOP.1 XSTOP.1 | 106.05,69.22 104.14,67.31 104.14,66.04 102.87,64.77 BQUAD.1 AQUAD.1 XQUAD.1 | 107.95,69.22 v107.95,70.48 | 125.09,69.22 v125.09,70.48
  Bottom 0.61: LPC1.28 172.09,82.55 158.75,69.22 125.09,69.22 107.95,69.22 106.05,69.22
  Bottom 0.813: 106.05,69.22 102.23,73.03 102.23,80.01 102.23,91.44 102.23,103.5
5V  (via drill 0.6)  (2 unrouted)
  Top 0.254: U$16.1 106.05,63.98 v106.05,63.5 | U$15.1 125.09,62.87 v121.28,59.05 | SG1.+ 161.22,73.1 176.53,57.78 183.51,57.78 JP8.3 | R23.2 42.12,66.89 41.91,66.67 41.91,63.23
  Top 0.305: 45.72,45.09 58.42,45.09 60.33,45.09 | 150.5,46.35 150.5,53.34 | JP6.7 44.45,52.7 44.45,50.8 45.09,50.16 45.09,45.72
  Top 0.406: JP2.1 JP2.3 JP2.5 JP2.7 120.65,54.61 117.47,51.44 117.47,45.09 | JP4.1 JP4.3 JP4.5 JP4.7 81.92,54.61 79.38,52.07 79.38,45.72 78.74,45.09 | JP6.1 JP6.3 JP6.5 JP6.7 | 140.34,45.09 132.72,45.09 | 149.22,45.09 140.34,45.09 | 132.72,45.09 117.47,45.09 | 112.39,45.09 102.87,45.09 | 117.47,45.09 112.39,45.09 | 102.87,45.09 95.25,45.09 | 66.04,45.09 60.33,45.09 | 74.3,45.09 66.04,45.09 | 78.74,45.09 74.3,45.09 | 95.25,45.09 78.74,45.09 | 149.22,45.09 150.5,46.35 | 132.72,45.09 133.99,46.35 U$4.VCC | JP10.7 JP10.5 JP10.3 JP10.1 17.78,53.34 17.78,46.35 19.05,45.09 20.32,45.09 | 153.03,45.09 152.72,45.09 | 152.72,45.09 149.22,45.09 | 170.81,45.09 153.03,45.09 | 178.44,45.09 170.81,45.09 | 183.51,45.09 186.69,45.09 187.96,46.35 187.96,53.34 | 183.51,45.09 178.44,45.09 | 178.44,45.09 179.07,45.72 U$9.RESET | 170.81,45.09 171.45,45.72 U$9.VCC | JP11.1 JP11.3 JP11.5 JP11.7 | JP11.7 164.47,54.61 | 153.03,45.09 154.31,46.35 154.31,52.07 156.84,54.61 JP11.7 | JP1.1 150.5,53.34 JP1.3 | 187.96,53.34 JP8.1 | 140.34,45.09 141.6,46.35 U$4.RESET | 113.03,53.34 JP3.3 | 113.03,53.34 113.03,45.72 112.39,45.09 | 113.03,53.34 JP3.1 | 102.87,45.09 104.14,46.35 U$3.RESET | 95.25,45.09 96.52,46.35 U$3.VCC | 75.56,53.34 JP5.3 | 75.56,53.34 75.56,46.35 74.3,45.09 | 75.56,53.34 JP5.1 | 66.04,45.09 66.67,45.72 U$2.RESET | 58.42,45.09 59.05,45.72 U$2.VCC | 27.94,45.09 25.08,45.09 | 25.08,45.09 20.32,45.09 | 36.83,45.09 27.94,45.09 | 44.45,45.09 42.86,45.09 | 42.86,45.09 36.83,45.09 | 45.72,45.09 44.45,45.09 | 44.45,45.09 45.09,45.72 | 38.1,53.34 JP9.3 | 38.1,53.34 38.1,46.35 36.83,45.09 | 38.1,53.34 JP9.1 | 27.94,45.09 29.21,46.35 U$1.RESET | 20.32,45.09 21.59,46.35 U$1.VCC
  Top 0.406: v187.96,82.55 187.96,53.34 | 187.96,53.34 JP8.3 | U$29.VCC 166.37,15.24 167.32,14.29 184.15,14.29 185.42,15.56 185.42,36.51 | 185.42,36.51 185.42,43.18 183.51,45.09 | U$27.VCC 128.91,14.61 129.54,13.97 v153.99,13.97 | U$25.VCC 91.44,15.24 92.39,14.29 v116.52,14.29 | U$23.VCC 53.98,15.24 54.93,14.29 v79.06,14.29 | U$21.VCC 16.51,15.24 17.46,14.29 v41.59,14.29 | 185.42,36.51 184.15,35.24 JP12.1 JP12.3 JP12.5 | 152.72,45.09 153.99,43.81 153.99,43.18 146.05,35.24 JP13.1 JP13.3 JP13.5 136.53,36.51 135.57,37.47 131.76,37.47 130.81,36.51 130.81,35.88 130.18,35.24 JP14.1 JP14.3 JP14.5 | 42.86,45.09 43.81,44.13 43.81,41.91 48.58,37.15 59.69,37.15 JP15.5 | JP16.3 26.67,43.5 25.08,45.09 | JP16.3 JP16.5 | JP16.3 JP16.1
  Top 0.813: U$7.2 36.66,63.23 41.91,63.23 C9.1 51.8,63.23 C8.+
  Bottom 0.254: v106.05,63.5 106.05,51.44 104.14,49.53 U$3.RESET | JP2.7 v121.28,59.05 | 131.44,27.94 130.81,27.3 128.27,27.3 127.64,27.94 127.64,41.27 U$4.VCC
  Bottom 0.406: v187.96,82.55 187.96,100.33 178.44,109.86 170.18,109.86 169.54,109.22 LPC1.2 | C8.+ 52.7,60.96 JP6.7 | v153.99,13.97 164.15,13.97 U$29.VCC | v116.52,14.29 127,14.29 U$27.VCC | v79.06,14.29 89.53,14.29 U$25.VCC | v41.59,14.29 52.07,14.29 U$23.VCC
+24V
  Top 0.406: K1.2 19.05,84.45 D2.C
  Top 0.61: F1.1 5.24,59.69 | 26.57,63.5 U$7.1 30.09,61.23 C7.1
  Top 0.813: TP1.TP 22.86,63.5 C6.+ 26.57,63.5
  Top 1.27: 31.75,20.32 U$21.VMOT | U$29.VMOT 181.61,18.73 180.02,20.32 158.12,20.32 | U$27.VMOT 144.15,20 144.46,20.32 | 106.68,20.32 U$25.VMOT | 69.22,20.32 U$23.VMOT
  Top 1.676: U$2.VMOT3 U$2.VMOT2 U$2.VMOT1 | U$3.VMOT3 U$3.VMOT2 U$3.VMOT1 | U$4.VMOT3 U$4.VMOT2 U$4.VMOT1 | U$9.VMOT3 U$9.VMOT2 U$9.VMOT1 | U$1.VMOT1 U$1.VMOT2 U$1.VMOT3
  Top 3.81: 3.81,67.31 F1.1 3.81,53.98 2.54,52.7 2.54,20.32 8.89,20.32 | 8.89,20.32 31.75,20.32 46.35,20.32 | 46.35,20.32 69.22,20.32 83.82,20.32 | 83.82,20.32 106.68,20.32 121.28,20.32 | 121.28,20.32 144.46,20.32 158.12,20.32 158.75,20.32 U$9.VMOT2 | U$1.VMOT2 8.89,20.32 | 46.35,20.32 U$2.VMOT2 | 83.82,20.32 U$3.VMOT2 | 121.28,20.32 U$4.VMOT2
  Bottom 0.406: D2.C 26.67,79.38 28.26,80.96 28.26,86.68 29.21,87.63 R19.2
  Bottom 1.676: R19.2 32.76,89.28 34.92,91.44 34.92,101.6 34.29,102.23 34.29,112.39 | C4.+ 12.7,6.35 8.89,10.16 U$1.VMOT2 | U$2.VMOT2 46.35,5.21 C3.+ | C2.+ 83.69,11.94 U$3.VMOT2 | C1.+ 121.16,11.94 U$4.VMOT2 | C10.+ 158.62,11.94 U$9.VMOT2 | C6.+ 24.13,67.31 20.32,71.12 8.89,71.12
  Bottom 2.54: 43.18,112.39 34.29,112.39 15.24,112.39 12.7,109.86 12.7,93.34 8.89,87.63 8.89,71.12 8.89,69.22 3.81,64.14 F1.1 | 43.18,112.39 57.15,112.39 | 57.15,112.39 71.12,112.39 X3.1 | 57.15,112.39 X4.1 | 43.18,112.39 X5.1
AA
  Bottom 1.27: U$27.D 139.06,14.92 139.7,14.29 140.97,14.29 141.6,13.65 U$4.A2
  Bottom 1.676: A.4 141.6,5.49 U$4.A2 U$4.A1
AB
  Bottom 1.27: U$4.B2 U$27.C
  Bottom 1.524: 137.24,11.99 U$4.B2
  Bottom 1.676: A.3 137.24,11.99 137.16,12.06 | U$4.B2 U$4.B1
AC
  Bottom 1.27: U$4.C1 U$27.B
  Bottom 1.524: 133.28,11.99 U$4.C1
  Bottom 1.676: A.2 133.28,11.99 133.35,12.06 | U$4.C1 U$4.C2
AD
  Bottom 1.27: U$27.A 131.44,14.61 131.13,14.29 129.54,14.29 128.91,13.65 U$4.D1
  Bottom 1.676: A.1 128.91,5.49 U$4.D1 U$4.D2
ADC1
  Top 0.406: U$4.DCY1 JP2.8
ADC2
  Top 0.406: U$4.DCY2 JP2.6
ADIR
  Top 0.254: U$15.4 128.91,62.23 131.44,59.69 U$4.DIR
  Bottom 0.254: U$27.DIR 126.36,41.59 131.44,46.67 U$4.DIR
AENABLE
  Top 0.254: U$15.5 130.18,62.23 137.16,55.24 142.88,55.24 144.15,53.98 U$4.EN
  Bottom 0.254: U$27.ENABLE U$4.EN
AM1
  Top 0.406: U$4.M1 JP2.4
AM2
  Top 0.406: U$4.M2 JP2.2
ASTEP  (via drill 0.6)
  Top 0.254: U$15.6 131.44,62.23 137.16,56.52 142.88,56.52 146.69,52.7 U$4.CLOCK | v140.97,42.86 v146.69,42.86
  Bottom 0.254: v140.97,42.86 130.81,42.86 128.91,40.96 U$27.STEP | v146.69,42.86 U$4.CLOCK
ATQ1
  Top 0.406: U$4.TQ1 JP1.4
ATQ2
  Top 0.406: U$4.TQ2 JP1.2
BA
  Bottom 1.27: U$29.D 176.53,14.92 177.16,14.29 178.75,14.29 179.07,13.97 U$9.A2
  Bottom 1.676: B.4 179.07,5.49 U$9.A2 U$9.A1
BB
  Bottom 1.27: U$9.B2 U$29.C
  Bottom 1.676: B.3 174.7,11.36 U$9.B2 U$9.B1
BC
  Bottom 1.27: 170.5,12.06 170.81,12.38 | U$9.C1 U$29.B
  Bottom 1.676: B.2 170.74,11.36 U$9.C1 170.5,12.06 U$9.C2
BD
  Bottom 1.27: U$29.A 168.91,14.92 168.28,14.29 167,14.29 166.37,13.65 U$9.D1
  Bottom 1.676: B.1 166.37,5.49 U$9.D1 U$9.D2
BDC1
  Top 0.254: U$9.DCY1 JP11.8
BDC2
  Top 0.254: U$9.DCY2 JP11.6
BDIR
  Top 0.254: U$15.7 132.72,62.23 137.16,57.78 166.37,57.78 168.91,55.24 U$9.DIR
  Bottom 0.254: U$9.DIR 168.91,45.72 163.83,40.64 U$29.DIR
BENABLE
  Top 0.254: U$15.8 133.99,62.23 137.16,59.05 172.72,59.05 176.53,55.24 179.07,55.24 181.61,52.7 U$9.EN
  Bottom 0.254: U$9.EN U$29.ENABLE
BM1
  Top 0.254: U$9.M1 JP11.4
BM2
  Top 0.254: U$9.M2 JP11.2
BSTEP  (via drill 0.6)
  Top 0.254: U$15.9 135.25,62.23 137.16,60.33 172.72,60.33 176.53,56.52 179.07,56.52 184.15,51.44 U$9.CLOCK | U$29.STEP 166.37,42.55 167.32,43.5 v183.2,43.5
  Bottom 0.254: v183.2,43.5 184.15,44.45 U$9.CLOCK
BTQ1
  Top 0.254: U$9.TQ1 JP8.4
BTQ2
  Top 0.254: U$9.TQ2 JP8.2
D+
  Top 0.254: LPC1.37 149.22,87 149.86,87.63 172.72,87.63 177.16,83.19 179.09,83.19 X2.D+
D-
  Top 0.254: LPC1.36 151.76,86.36 152.4,87 172.09,87 177.16,81.92 178.34,81.92 X2.D-
ETHRD+
  Top 0.254: U$6.7 171.96,70.61 159.38,83.19 LPC1.33
ETHRD-
  Top 0.254: U$6.8 173.23,71.88 161.93,83.19 LPC1.32
ETHTD+
  Top 0.254: U$6.1 174.5,62.99 154.31,83.19 LPC1.35
ETHTD-
  Top 0.254: U$6.2 175.77,64.26 156.84,83.19 LPC1.34
GND  (via drill 0.6, 1.91)
  Top 0.254: 188.92,93.98 188.92,92.89 U1.GND3 187.92,90.77 186.69,89.53 183.39,89.53 X2.P$1 179.06,89.2 U1.CD1 U1.CD2 | 188.92,93.98 U1.GND1 | U1.6 188.02,94.88 188.92,93.98 | U$15.2 126.36,66.04 125.09,67.31 | U$16.12 121.92,66.04 120.65,67.31 121.92,68.58 U$16.13 | U$16.11 120.65,66.04 119.38,67.31 | U$16.2 109.22,66.04 107.95,67.31 | U$16.22 110.49,68.58 109.22,67.31 | U$15.22 127.64,68.58 126.36,67.31 | U$15.12 139.06,66.04 137.79,67.31 139.06,68.58 U$15.13 | U$15.11 137.79,66.04 136.53,67.31 | R20.1 145.84,70.27 142.88,67.31 | R10.1 179.92,52.49 v178.44,53.98 | JP7.1 131.44,110.49 132.08,109.86 154.94,109.86 156.84,111.76 170.81,111.76 172.09,110.49 LPC1.1 | R6.1 67.53,53.76 v67.31,53.98 | R4.1 104.99,53.76 v104.78,53.98 | R2.1 142.46,53.12 v142.24,53.34 | C5.2 177.63,76.2 U$6.GNDR
  Top 0.406: R15.1 40.83,96.11 LED3.C Q3.S | R13.1 54.8,96.11 LED2.C Q2.S | R11.1 68.77,96.11 LED1.C Q1.S | Q5.3 34.29,88.27 36.2,90.17 | LED4.C 41.91,83.42 R17.1 41.91,78.11 41.93,78.08 | R8.1 30.06,52.28 v30.48,52.7 | C7.2 31.75,59.05 31.11,58.42 26.67,58.42 C6.- | SPINSPD.3 LPC1.54
  Top 0.813: Q4.3 144.15,67.31 142.88,67.31 137.79,67.31 136.53,67.31 126.36,67.31 125.09,67.31 120.65,67.31 119.38,67.31 109.22,67.31 107.95,67.31 v100.97,67.31 | C8.- 51.44,66.67 48.26,69.85 | 48.26,69.85 47.62,70.48 44.45,70.48 | 44.45,70.48 v37.47,70.48 v36.2,70.48 34.29,70.48 31.75,67.94 U$7.3 31.75,67.31 | LED6.C 45.72,69.22 44.45,70.48 | 48.26,69.85 C9.2
  Top 1.676: v24.13,73.66 31.11,73.66 31.75,73.03 U$7.3
  Top 1.93: 61.59,100.33 Q1.S | 48.26,100.33 Q2.S | 35.56,100.33 Q3.S
  Top 2.54: v11.43,64.14 U$19.4 | 61.59,100.33 61.59,91.44 60.33,90.17 54.02,90.17 49.55,85.7 | 48.26,84.42 49.55,85.7 | 48.26,84.45 48.26,90.17 | 48.26,90.17 48.26,100.33 | 49.55,85.7 48.26,84.45 | 35.56,100.33 35.56,90.81 36.2,90.17 48.26,90.17 | 48.26,84.42 48.26,84.45 | U$7.3 41.93,78.08 48.26,84.42
  Top 3.81: U$7.3 21.55,67.91 TP2.TP 17.78,64.14 v11.43,64.14
  Bottom 0.254: U$6.GNDL 178.44,59.44 | v67.31,53.98 67.31,50.16 67.94,49.53 67.94,20.32 | v104.78,53.98 102.87,52.07 102.87,20.32 | v142.24,53.34 142.24,50.16 142.88,49.53 142.88,20.32 | v178.44,53.98 178.44,50.16 177.8,49.53 177.8,20.32
  Bottom 0.406: v30.48,52.7 28.57,52.7 27.94,52.07 | AQUAD.2 XQUAD.2 | ZQUAD.2 YQUAD.2 | v178.44,53.98 178.44,59.44 U$6.GNDL
  Bottom 0.813: C6.- 19.68,56.52 8.26,56.52 8.89,59.05 | X2.GND 181.63,84.44 182.88,83.19 | 182.88,83.19 182.88,77.34 X2.P$2 182.75,77.47 180.34,77.47 178.81,75.94 U$6.GNDR U$6.GNDL 149.73,59.82 146.05,63.5 Q4.3 | 182.88,83.19 183.06,83.36 X2.P$1 182.88,89.38 182.88,100.33 175.26,107.95 LPC1.1 | SPINSPD.3 ADC1.3 ADC2.3 BSTOP.3 XSTOP.3 57.15,85.09 | ASTOP.3 91.44,110.49 90.81,111.12 86.36,111.12 85.72,110.49 ZSTOP.3 78.11,110.49 76.2,108.58 76.2,97.79 | DOOR.3 TOOLZERO.3 YSTOP.3 76.2,97.79 | 76.2,97.79 76.2,95.25 71.12,90.17 59.69,90.17 57.15,87.63 57.15,85.09 | 57.15,85.09 57.15,74.3 52.7,69.85 C8.- 56.52,66.67 57.15,67.31 ZQUAD.2 | v100.97,67.31 BQUAD.2 AQUAD.2
  Bottom 1.27: 51.44,20.32 U$23.GND1 | 66.67,20.32 U$23.GND2 | 88.9,20.32 U$25.GND1 | 104.14,20.32 U$25.GND2 | 13.97,20.32 U$21.GND1 | 29.21,20.32 U$21.GND2 | 163.83,20.32 U$29.GND1 | U$29.GND2 179.07,20 178.75,20.32 | U$27.GND2 141.6,20 141.29,20.32 | U$27.GND1 126.36,20 126.68,20.32
  Bottom 1.676: C4.- 8.64,5.33 2.54,11.43 2.54,20.32 | C3.- 41.91,5.08 36.83,10.16 U$1.PGND2 | U$9.PGND3 U$9.PGND2 U$9.PGND1 | C10.- 153.67,5.08 149.22,9.53 U$4.PGND2 | U$4.PGND2 U$4.PGND3 | U$4.PGND2 U$4.PGND1 | C1.- 116.2,5.08 111.76,9.53 U$3.PGND2 | U$3.PGND2 U$3.PGND1 | U$3.PGND2 U$3.PGND3 | C2.- 78.11,5.08 74.3,8.89 U$2.PGND2 | U$2.PGND2 U$2.PGND1 | U$2.PGND2 U$2.PGND3 | U$1.PGND2 U$1.PGND3 | U$1.PGND2 U$1.PGND1 | U$1.DGND 2.54,47.62 2.54,49.53 | 43.81,20.32 U$2.DGND | 81.28,20.32 U$3.DGND | 118.75,20.32 U$4.DGND | 156.21,20.32 U$9.DGND | 13.34,87 13.34,78.74 18.41,73.66 v24.13,73.66
  Bottom 1.778: R21.1 14.98,88.64 13.34,87
  Bottom 2.54: v11.43,64.14 13.34,64.77
  Bottom 3.81: 36.83,20.32 29.21,20.32 13.97,20.32 2.54,20.32 2.54,49.53 2.54,52.7 8.89,59.05 v11.43,64.14 | 36.83,20.32 43.81,20.32 51.44,20.32 66.67,20.32 67.94,20.32 74.3,20.32 | 74.3,20.32 81.28,20.32 88.9,20.32 102.87,20.32 104.14,20.32 111.76,20.32 | 111.76,20.32 118.75,20.32 126.68,20.32 141.29,20.32 142.88,20.32 149.22,20.32 | 149.22,20.32 156.21,20.32 163.83,20.32 177.8,20.32 178.75,20.32 186.69,20.32 U$9.PGND2 | 149.22,20.32 U$4.PGND2 | 111.76,20.32 U$3.PGND2 | 74.3,20.32 U$2.PGND2 | 36.83,20.32 U$1.PGND2
  other vias: 26.04,75.56 27.3,75.56 28.57,75.56 29.84,75.56 31.11,75.56 32.38,75.56 33.66,75.56 34.92,75.56 36.2,75.56 37.47,75.56 37.47,74.3 36.2,74.3 34.92,74.3 33.66,74.3 32.38,74.3 31.11,74.3 29.84,74.3 28.57,74.3 27.3,74.3 26.04,74.3 26.04,73.03 27.3,73.03 28.57,73.03 29.84,73.03 31.11,73.03 32.38,73.03 33.66,73.03 34.92,73.03 36.2,73.03 37.47,73.03 37.47,71.75 36.2,71.75 34.92,71.75 33.66,71.75 32.38,71.75 31.11,71.75 29.84,71.75 28.57,71.75 27.3,71.75 26.04,71.75 27.3,70.48 27.3,69.22 27.3,67.94 27.3,66.67 26.04,66.67 26.04,67.94 26.04,69.22 26.04,70.48 36.2,69.22 36.2,67.94 36.2,66.67 37.47,66.67 37.47,67.94 37.47,69.22
  pour Top: -2.54,-2.54 193.04,-2.54 193.04,116.84 -2.54,116.84
  pour Bottom: -2.54,116.84 193.04,116.84 193.04,-2.54 -2.54,-2.54
N$1
  Bottom 0.254: U$21.RESET U$21.SLEEP
N$2
  Bottom 0.254: U$23.SLEEP U$23.RESET
N$3
  Bottom 0.254: U$25.SLEEP U$25.RESET
N$4  (1 unrouted)
N$5
  Bottom 0.254: U$29.SLEEP U$29.RESET
N$6
  Top 3.81: F1.3 3.81,90.17 2.54,91.44 2.54,99.06 3.81,100.33 X7.2
  Bottom 3.81: X7.2 3.81,100.33 2.54,99.06 2.54,91.44 3.81,90.17 F1.3
N$7
  Bottom 0.254: U$21.MS1 JP16.2
N$8
  Top 0.406: R3.2 98.84,47.84 U$3.PROTECT
N$9
  Bottom 0.254: U$21.MS2 JP16.4
N$10
  Top 0.254: JP16.6 21.38,32.7 R22.2
  Bottom 0.254: U$21.ROSC JP16.6
N$11
  Bottom 0.254: U$23.MS1 JP15.2
N$12
  Bottom 0.254: U$23.MS2 JP15.4
N$13
  Top 0.254: JP15.6 58.84,32.7 R24.2
  Bottom 0.254: U$23.ROSC JP15.6
N$14
  Bottom 0.254: U$25.MS1 JP14.2
N$15
  Bottom 1.778: X1.1 29.21,98.5 K1.NO 29.21,96.66 R19.1
N$16
  Top 0.406: R1.2 136.31,47.84 U$4.PROTECT
N$17
  Top 1.93: Q1.D 68.58,102.23 66.04,104.78 X3.2
N$18
  Top 0.406: LED1.A 68.77,93.11 R12.1
N$19
  Top 1.93: Q2.D 54.61,102.23 52.07,104.78 X4.2
N$20
  Top 0.406: LED2.A 54.8,93.11 R14.1
N$21
  Bottom 0.254: U$25.MS2 JP14.4
N$22
  Top 0.254: JP14.6 96.31,32.7 R25.2
  Bottom 0.254: U$25.ROSC JP14.6
N$23
  Bottom 0.254: U$27.MS1 JP13.2
N$24
  Bottom 0.254: U$27.MS2 JP13.4
N$25
  Top 1.93: Q3.D 40.64,102.87 X5.2
N$26
  Top 0.406: LED3.A 40.83,93.11 R16.1
N$27
  Top 2.54: U$19.1 12.7,77.95
  Top 3.81: X7.1 12.7,100.97 12.7,77.95
N$29
  Bottom 1.778: K1.C X1.2
N$30
  Top 0.406: Q5.1 31.68,83.82 K1.1 29.21,84.45 D2.A
N$31
  Top 0.254: JP13.6 133.77,32.7 R26.2
  Bottom 0.254: U$27.ROSC JP13.6
N$32
  Bottom 0.254: U$29.MS1 JP12.2
N$33
  Bottom 0.254: U$29.MS2 JP12.4
N$34
  Top 0.254: JP12.6 171.24,32.7 R27.2
  Bottom 0.254: U$29.ROSC JP12.6
N$35
  Top 0.406: R18.1 39.37,83.42 LED4.A
N$37
  Bottom 1.778: X1.3 19.05,99.77 18.13,98.84 K1.NC 19.05,96.66 R21.2
N$38
  Top 0.254: Q4.1 154.38,65.41 SG1.-
N$39
  Top 0.254: R23.1 45.7,65.19 LED6.A
N$42
  Top 0.406: R9.2 173.78,47.84 U$9.PROTECT
N$43
  Top 0.406: R7.2 23.91,47.84 24.13,47.84 U$1.PROTECT
N$44
  Top 0.406: R5.2 61.38,47.84 U$2.PROTECT
P0.0
  Top 0.254: LPC1.9 151.76,91.44 147.96,87.63 147.96,80.01 142.88,74.93 137.16,74.93 136.53,74.3 U$15.15
P0.1
  Top 0.254: LPC1.10 149.22,91.44 145.41,87.63 145.41,82.55 139.7,76.83 136.53,76.83 133.99,74.3 U$15.17
P0.2
  Top 0.254: LPC1.21 121.28,109.22 120.02,110.49 102.87,110.49 100.97,112.39 87,112.39 82.55,107.95 ZSTOP.2
P0.3
  Top 0.254: LPC1.22 118.75,108.58 117.47,109.86 102.87,109.86 100.97,107.95 ASTOP.2
P0.4
  Top 0.254: U$15.16 135.25,74.3 137.16,76.2 140.34,76.2 146.69,82.55 LPC1.38
P0.5
  Top 0.254: LPC1.39 144.15,82.55 139.06,77.47 135.89,77.47 132.72,74.3 U$15.18
P0.6
  Top 0.254: U1.2 181.39,99.28 175.9,104.78 163.83,104.78 163.19,105.41 163.19,109.22 161.93,110.49 156.84,110.49 LPC1.8
P0.7
  Top 0.254: LPC1.7 158.12,109.22 160.02,109.22 160.66,108.58 160.66,104.14 162.56,102.23 175.9,102.23 177.16,100.97 177.16,97.16 178.34,95.98 U1.5
P0.8
  Top 0.254: LPC1.6 159.38,104.14 162.56,100.97 175.9,100.97 176.53,100.33 176.53,95.89 178.63,93.78 U1.7
P0.9
  Top 0.254: U1.3 181.22,98.18 175.9,103.5 162.56,103.5 161.93,104.14 LPC1.5
P0.10
  Top 0.254: U$15.20 130.18,74.3 134.62,78.74 137.79,78.74 141.6,82.55 LPC1.40
P0.11
  Top 0.254: LPC1.41 139.06,82.55 136.53,80.64 133.99,80.64 128.91,75.56 121.28,75.56 120.65,74.93 U$16.14
P0.15
  Bottom 0.254: LPC1.13 JP7.5
P0.16
  Bottom 0.254: LPC1.14 JP7.4
P0.17
  Top 0.254: U$15.21 128.91,74.3 133.99,79.38 137.16,79.38 140.34,82.55 140.34,87.63 144.15,91.44 LPC1.12
P0.18
  Top 0.254: U$15.19 131.44,74.3 135.25,78.11 138.43,78.11 142.88,82.55 142.88,87.63 146.69,91.44 LPC1.11
P0.19
  Top 0.254: DOOR.2 98.42,95.25 105.09,101.92 107.3,101.92 LPC1.57
P0.20  (via drill 0.61)
  Top 0.254: v103.63,83.95 99.31,83.95 97.92,82.55 SPINSPD.2
  Bottom 0.254: v103.63,83.95 103.63,102.62 105.54,104.52 109.09,104.52 110.36,103.25 111.12,103.25 LPC1.56
P0.21  (via drill 0.61)
  Top 0.254: v93.6,106.68 90.55,103.63 80.45,103.63 76.52,99.69 76.52,87.82 71.25,82.55 BSTOP.2
  Bottom 0.254: LPC1.23 115.57,107.95 114.3,109.22 101.73,109.22 99.19,106.68 v93.6,106.68
P0.22  (via drill 0.61)
  Top 0.254: LPC1.24 114.3,107.95 123.44,98.81 128.4,98.81 137.79,89.41 137.79,83.95 v135.51,81.66 | v111.51,71.12 v120.9,71.12 | v105.66,71.5 103.38,71.5 v102.62,70.74
  Bottom 0.254: v135.51,81.66 135.51,79.12 141.35,73.28 141.35,72.26 140.59,71.5 121.28,71.5 v120.9,71.12 | v111.51,71.12 110.36,71.12 109.98,71.5 v105.66,71.5 | v102.62,70.74 102.62,71.25 100.2,73.66 89.53,73.66 AQUAD.4
P0.23  (via drill 0.6)
  Top 0.254: 16.69,75.39 U$19.2 16.84,76.83 v18.41,76.83
  Bottom 0.254: v18.41,76.83 19.05,77.47 31.11,77.47 37.47,83.82 37.47,97.16 38.1,97.79 71.75,97.79 74.3,100.33 74.3,110.49 76.83,113.03 128.27,113.03 130.81,110.49 135.25,110.49 136.53,109.22 LPC1.15
P0.24  (via drill 0.6)
  Top 0.254: U$19.3 18.41,69.22 19.68,70.48 19.68,75.56 v20.32,76.2
  Bottom 0.254: LPC1.16 133.99,109.22 133.35,109.86 130.18,109.86 127.64,112.39 77.47,112.39 74.93,109.86 74.93,99.69 72.39,97.16 38.73,97.16 38.1,96.52 38.1,83.19 31.75,76.83 20.95,76.83 v20.32,76.2
P0.25  (via drill 0.61)
  Top 0.254: v94.87,107.7 94.87,104.01 v94.74,103.89 | v93.73,99.82 93.73,87.88 88.39,82.55 ADC1.2
  Bottom 0.254: LPC1.17 130.81,107.95 128.91,109.86 99.82,109.86 99.19,109.22 96.39,109.22 v94.87,107.7 | v94.74,103.89 94.74,100.84 v93.73,99.82
P0.26  (5 unrouted)
P0.27  (via drill 0.61)
  Top 0.254: v122.43,96.65 125.98,96.65 131.19,91.44 v131.19,87.76 | v104.65,72.52 102.62,72.52 v101.22,71.12
  Bottom 0.254: v122.43,96.65 LPC1.25 | v131.19,87.76 129.67,87.76 127.64,85.72 127.64,84.45 115.7,72.52 v104.65,72.52 | v101.22,71.12 89.53,71.12 AQUAD.3
P0.28  (via drill 0.61)
  Top 0.254: LPC1.26 107.95,107.95 101.6,101.6 92.96,101.6 90.3,98.93 90.3,97.16 89.66,96.52 86.87,96.52 86.23,95.89 86.23,81.92 86.87,81.28 103.25,81.28 v103.63,81.66 | v103.63,74.55 99.95,74.55 BQUAD.4
  Bottom 0.254: v103.63,81.66 v103.63,74.55
P1.20
  Top 0.254: U$16.20 113.03,74.93 117.47,79.38 125.09,79.38 125.09,88.9 123.5,90.5 LPC1.71
P1.23
  Top 0.254: U$16.18 115.57,74.93 118.75,78.11 126.36,78.11 127.64,79.38 127.64,91.44 126.03,93.04 LPC1.68
P1.24  (via drill 0.61)
  Top 0.254: v99.06,88.52 106.05,95.5 LPC1.67 | v54.99,88.01 v59.44,88.01 | v43.56,88.01 42.8,88.01 42.04,87.25 R17.2
  Top 0.406: R17.2 R18.2 37.68,87.21 36.2,85.72 Q5.2
  Bottom 0.254: v99.06,88.52 59.94,88.52 v59.44,88.01 | v43.56,88.01 v54.99,88.01
P1.25  (via drill 0.6)
  Top 0.254: Q4.2 147.53,67.53 R20.2 147.53,73.88 v148.59,74.93
  Bottom 0.254: v148.59,74.93 148.59,81.28 150.5,83.19 150.5,88.9 145.1,94.3 109.87,94.3 LPC1.66
P1.26
  Top 0.254: LPC1.65 126.03,95.58 130.18,91.44 130.18,79.38 127.64,76.83 120.02,76.83 118.11,74.93 U$16.16
P1.27  (via drill 0.61)
  Top 0.254: v174.88,49.66 175.39,50.16 175.39,51.31 R9.1 | v101.09,43.94 v149.73,43.94 | v95.76,63.63 95.76,70.48 96.39,71.12 99.69,71.12 102.11,73.53 104.14,73.53 v105.03,74.42
  Top 0.406: R9.1 R10.2
  Bottom 0.254: v174.88,49.66 155.45,49.66 v149.73,43.94 | v101.09,43.94 97.79,47.24 97.79,61.59 v95.76,63.63 | v105.03,74.42 105.03,84.2 104.78,84.45 104.78,96.77 106.05,98.04 LPC1.64
P1.28  (via drill 0.61)
  Top 0.254: v140.84,54.23 140.84,51.56 R2.2 | v146.3,61.34 152.4,61.34 156.97,65.91 156.97,67.31 152.78,71.5 v149.1,71.5 | v111,88.77 109.86,89.92 109.86,96.77 108.58,98.04 LPC1.63
  Top 0.406: R1.1 R2.2
  Bottom 0.254: v140.84,54.23 140.84,55.88 v146.3,61.34 | v149.1,71.5 148.21,71.5 135.25,84.45 135.25,85.72 132.21,88.77 v111,88.77
P1.29
  Top 0.254: LPC1.62 126.03,98.12 132.72,91.44 132.72,80.64 128.27,76.2 120.65,76.2 119.38,74.93 U$16.15
P1.30
  Top 0.254: LPC1.19 126.36,109.86 123.19,113.03 86.36,113.03 82.55,109.22 77.47,109.22 75.56,107.63 75.56,95.25 71.12,90.81 67.94,90.81 65.41,88.27 65.41,85.09 62.87,82.55 XSTOP.2
P1.31
  Top 0.254: YSTOP.2 80.64,95.25 81.92,96.52 81.92,100.97 83.82,102.87 99.06,102.87 101.6,105.41 101.6,106.68 104.14,109.22 116.84,109.22 117.47,108.58 117.47,106.68 118.11,106.05 121.92,106.05 LPC1.20
P2.0  (via drill 0.61)
  Top 0.254: v126.62,87.76 v126.62,89.79 | v108.33,87.76 106.17,87.76 104.9,86.49 v93.85,86.49 | v64.39,86.49 64.39,88.27 68.2,92.08 69.85,92.08 70.61,92.84 70.61,93.22 R12.2
  Top 0.406: R12.2 R11.2 71.12,96.31 Q1.G
  Bottom 0.254: LPC1.42 136.53,85.47 132.21,89.79 v126.62,89.79 | v108.33,87.76 v126.62,87.76 | v64.39,86.49 v93.85,86.49
P2.1  (via drill 0.61)
  Top 0.254: v150.11,67.94 v150.11,70.48 | v144.65,64.01 v147.45,64.01 | v47.5,42.93 v111.25,42.93 | v58.29,93.34 R14.2
  Top 0.406: R14.2 R13.2 57.15,96.31 Q2.G
  Bottom 0.254: LPC1.43 133.99,84.71 148.21,70.48 v150.11,70.48 | v150.11,67.94 154.94,67.94 155.32,68.33 158.5,68.33 159,67.82 159,66.8 154.81,62.61 148.72,62.61 147.45,63.88 v147.45,64.01 | v144.65,64.01 144.65,62.48 131.19,49.02 117.35,49.02 v111.25,42.93 | v47.5,42.93 47.62,47.24 47.62,48.9 41.91,54.61 41.91,91.44 43.81,93.34 v58.29,93.34
P2.2  (via drill 0.61)
  Top 0.254: v131.44,81.66 LPC1.44 | v140.34,72.77 144.91,72.77 148.08,75.95 149.35,75.95 v157.99,67.31 | v150.5,63.63 149.22,62.36 143,62.36 v142.62,61.98 | v44.32,92.33 42.93,93.73 R16.2
  Top 0.406: R16.2 R15.2 43.18,96.31 Q3.G
  Bottom 0.254: v140.34,72.77 v131.44,81.66 | v157.99,67.31 157.99,66.93 154.69,63.63 v150.5,63.63 | v142.62,61.98 142.62,62.23 138.81,66.04 105.54,66.04 104.27,64.77 104.27,54.99 100.33,51.05 100.33,46.23 102.11,44.45 102.11,43.43 102.04,43.37 101.6,42.93 101.54,42.86 97.16,42.86 95.25,44.77 95.25,48.58 94.61,49.21 93.34,49.21 92.71,48.58 92.71,46.99 92.08,46.35 85.72,46.35 85.09,46.99 85.09,48.26 77.47,55.88 57.15,55.88 54.61,53.34 45.72,53.34 42.55,56.52 42.55,90.55 v44.32,92.33
P2.3
  Top 0.254: U$16.17 116.84,74.93 119.38,77.47 127,77.47 128.91,79.38 LPC1.45
P2.4
  Top 0.254: LPC1.46 126.36,79.38 125.73,78.74 118.11,78.74 114.3,74.93 U$16.19
P2.5
  Top 0.254: LPC1.47 123.83,81.28 122.56,80.01 116.84,80.01 111.76,74.93 U$16.21
P2.6
  Top 0.254: LPC1.48 119.38,83.19 118.11,83.19 110.49,75.56 80.64,75.56 78.74,73.66 XQUAD.4
P2.7
  Top 0.254: XQUAD.3 76.83,69.85 76.2,70.48 76.2,73.03 79.38,76.2 109.86,76.2 LPC1.49
P2.8
  Top 0.254: YQUAD.4 69.22,74.93 71.12,76.83 107.95,76.83 LPC1.50
P2.10
  Top 0.254: YQUAD.3 67.31,69.85 66.67,70.48 66.67,74.3 69.85,77.47 106.05,77.47 LPC1.51
P2.11
  Top 0.254: ZQUAD.4 59.69,74.93 62.87,78.11 104.14,78.11 LPC1.52
P2.12
  Top 0.254: ZQUAD.3 57.78,69.85 57.15,70.48 57.15,75.56 60.33,78.74 102.23,78.74 LPC1.53
P2.13  (via drill 0.61)
  Top 0.254: v73.91,83.69 81.41,91.19 81.41,93.6 87.25,99.44 89.28,99.44 92.08,102.23 100.33,102.23 LPC1.27 | v61.72,83.69 61.21,83.69 61.09,83.82 58.29,83.82 55.5,81.03 v55.5,70.74
  Bottom 0.254: v73.91,83.69 70.74,83.69 70.61,83.82 61.85,83.82 v61.72,83.69 | v55.5,70.74 56.13,70.74 58.29,68.58 96.52,68.58 BQUAD.3
P3.25  (via drill 0.61)
  Top 0.254: v103.25,56.77 103.25,51.56 R4.2 | v103.25,63.63 103.25,65.02 v102.36,65.91 | v103.89,69.47 105.16,69.47 106.68,70.99 v106.68,74.55
  Top 0.406: R3.1 R4.2
  Bottom 0.254: v103.25,56.77 v103.25,63.63 | v102.36,65.91 102.36,67.94 v103.89,69.47 | v106.68,74.55 106.68,83.82 107.31,84.45 107.31,99.31 106.05,100.58 LPC1.61
P3.26  (via drill 0.61)
  Top 0.254: v62.99,58.67 62.99,51.56 R5.1 | v56.39,65.28 56.39,67.18 47.75,75.82 47.75,79.12 55.24,86.61 v61.34,86.61 | v100.84,87.5 104.9,87.5 107.31,89.92 107.31,99.31 108.58,100.58 LPC1.60
  Top 0.406: R5.1 R6.2
  Bottom 0.254: v62.99,58.67 v56.39,65.28 | v61.34,86.61 62.23,87.5 v100.84,87.5
P4.28  (via drill 0.61)
  Top 0.254: v27.81,53.59 27.81,50.29 R8.2 | v31.62,57.4 32.89,57.4 37.72,62.23 97.92,62.23 99.82,64.14 99.82,67.69 100.58,68.45 107.44,68.45 v109.47,70.48 | v133.99,83.19 135.25,84.45 135.25,90.42 v130.05,95.63
  Top 0.406: R7.1 R8.2
  Bottom 0.254: v27.81,53.59 v31.62,57.4 | v109.47,70.48 110.62,70.48 111,70.1 118.36,70.1 131.44,83.19 v133.99,83.19 | v130.05,95.63 116.08,95.63 111.12,100.58 LPC1.59
P4.29
  Top 0.254: TOOLZERO.2 91.44,95.25 92.71,96.52 92.71,100.33 93.34,100.97 102.23,100.97 104.14,102.87 105.72,102.87 LPC1.58
XA
  Bottom 1.27: U$21.D 26.67,14.29 28.57,14.29 29.21,13.65 U$1.A2
  Bottom 1.676: X.4 29.21,5.49 U$1.A2 U$1.A1
XB
  Bottom 1.27: U$1.B2 U$21.C
  Bottom 1.676: X.3 24.84,11.36 25.55,12.06 U$1.B1 U$1.B2
XC
  Bottom 1.27: U$1.C1 U$21.B
  Bottom 1.676: X.2 20.88,11.36 U$1.C1 U$1.C2
XD
  Bottom 1.27: U$21.A 19.05,14.29 17.14,14.29 16.51,13.65 U$1.D1
  Bottom 1.676: X.1 16.51,5.49 U$1.D1 U$1.D2
XDC1
  Top 0.406: U$1.DCY1 JP10.8
XDC2
  Top 0.406: U$1.DCY2 JP10.6
XDIR
  Top 0.254: U$16.3 110.49,62.23 109.86,61.59 38.1,61.59 31.11,54.61 23.5,54.61 19.05,50.16 U$1.DIR
  Bottom 0.254: U$1.DIR 19.05,46.67 13.97,41.59 U$21.DIR
XENABLE
  Top 0.254: U$16.4 111.76,62.23 110.49,60.96 38.73,60.96 31.75,53.98 U$1.EN
  Bottom 0.254: U$21.ENABLE U$1.EN
XM1
  Top 0.406: U$1.M1 JP10.4
XM2
  Top 0.406: U$1.M2 JP10.2
XSTEP
  Top 0.254: U$16.5 113.03,62.23 111.12,60.33 39.37,60.33 34.29,55.24 U$1.CLOCK
  Bottom 0.254: U$21.STEP 16.51,27.3 17.14,26.67 33.02,26.67 34.29,27.94 U$1.CLOCK
XTQ1
  Top 0.406: U$1.TQ1 JP9.4
XTQ2
  Top 0.406: U$1.TQ2 JP9.2
YA
  Bottom 1.27: U$23.D 64.14,14.61 64.45,14.29 66.36,14.29 66.67,13.97 U$2.A2
  Bottom 1.676: Y.4 66.67,5.49 U$2.A2 U$2.A1
YB
  Bottom 1.27: U$2.B2 U$23.C
  Bottom 1.676: Y.3 62.3,11.36 U$2.B2 U$2.B1
YC
  Bottom 1.27: U$2.C1 U$23.B
  Bottom 1.676: Y.2 58.34,11.36 U$2.C1 U$2.C2
YD
  Bottom 1.27: U$23.A 56.52,14.61 56.2,14.29 54.61,14.29 53.98,13.65 U$2.D1
  Bottom 1.676: Y.1 53.98,5.49 U$2.D1 U$2.D2
YDC1
  Top 0.406: U$2.DCY1 JP6.8
YDC2
  Top 0.406: U$2.DCY2 JP6.6
YDIR
  Top 0.254: U$16.6 114.3,62.23 111.76,59.69 60.96,59.69 56.52,55.24 U$2.DIR
  Bottom 0.254: U$23.DIR 51.44,41.59 56.52,46.67 U$2.DIR
YENABLE
  Top 0.254: U$16.7 115.57,62.23 112.39,59.05 71.12,59.05 69.22,57.15 U$2.EN
  Bottom 0.254: U$23.ENABLE U$2.EN
YM1
  Top 0.406: U$2.M1 JP6.4
YM2
  Top 0.406: U$2.M2 JP6.2
YSTEP  (via drill 0.6)
  Top 0.254: U$16.8 116.84,62.23 113.03,58.42 73.03,58.42 71.75,57.15 U$2.CLOCK | U$23.STEP 53.98,29.77 54.69,30.48 v71.75,30.48
  Bottom 0.254: v71.75,30.48 U$2.CLOCK
YTQ1
  Top 0.406: U$2.TQ1 JP5.4
YTQ2
  Top 0.406: U$2.TQ2 JP5.2
ZA
  Bottom 1.27: U$25.D 101.6,14.92 102.23,14.29 103.5,14.29 104.14,13.65 U$3.A2
  Bottom 1.676: Z.4 104.14,5.49 U$3.A2 U$3.A1
ZB
  Bottom 1.27: U$3.B2 U$25.C
  Bottom 1.676: Z.3 99.77,11.36 U$3.B2 U$3.B1
ZC
  Bottom 1.27: U$3.C1 U$25.B
  Bottom 1.676: Z.2 95.81,11.36 95.1,12.06 U$3.C2 U$3.C1
ZD
  Bottom 1.27: U$25.A 93.98,14.61 93.66,14.29 92.08,14.29 91.44,13.65 U$3.D1
  Bottom 1.676: Z.1 91.44,5.49 U$3.D1 U$3.D2
ZDC1
  Top 0.406: U$3.DCY1 JP4.8
ZDC2
  Top 0.406: U$3.DCY2 JP4.6
ZDIR
  Top 0.254: 118.11,63.5 U$16.9 118.11,62.23 113.67,57.78 95.89,57.78 93.98,55.88 U$3.DIR
  Bottom 0.254: U$25.DIR 88.9,41.59 93.98,46.67 U$3.DIR
ZENABLE
  Top 0.254: 119.38,63.5 U$16.10 119.38,62.23 114.3,57.15 109.22,57.15 106.68,54.61 U$3.EN
  Bottom 0.254: U$25.ENABLE U$3.EN
ZM1
  Top 0.406: U$3.M1 JP4.4
ZM2
  Top 0.406: U$3.M2 JP4.2
ZSTEP  (via drill 0.6)
  Top 0.254: U$15.3 127.64,62.23 121.92,56.52 111.12,56.52 109.22,54.61 U$3.CLOCK | U$25.STEP 91.44,40.96 92.08,41.59 v109.22,41.59
  Bottom 0.254: v109.22,41.59 U$3.CLOCK
ZTQ1
  Top 0.406: U$3.TQ1 JP3.4
ZTQ2
  Top 0.406: U$3.TQ2 JP3.2

## Text on the board
tPlace: M2 | OFF | OFF | ON | ON | T2 | OFF | OFF | OFF | ON | D2 | OFF | OFF | ON | ON | M1 | T1 | D1 | OFF | ON | OFF | ON | OFF | ON | ON | OFF | OFF | ON | ON | ON | FULL | HALF | 1/4 | 1/8 | TORQUE | 100% | 75% | 50% | 25% | DECAY | NORMAL 0% | 25% | 50% | 100% | BOTSTEP23 | CONFIGURATION | STEP MODE | revA | Z ENDSTOP | Y ENDSTOP | X ENDSTOP | 5mm Fuse - 15A | X AXIS | Y AXIS | B AXIS | D1 | D2 | M1 | M2 | T1 | T2 | D1 | D2 | M1 | M2 | T1 | T2 | D1 | D2 | M1 | M2 | Z AXIS | T1 | T2 | D1 | D2 | M1 | M2 | T1 | T2 | D1 | D2 | M1 | M2 | T1 | T2 | A AXIS
bPlace: Copyright 2012 | License: GPLv3 | Documentation: http://bit.ly/???? | Design by: Zach Hoeken / Hoektronics Inc. | HoekStep23 CNC Controller